# Altium PCB LT4320_1.PcbDoc
Units mil, origin at the board's own origin, x right, y up, seen from the top; angles counter-clockwise.
Board outline 6000 x 4000 mil, 2 copper layers (Top Layer, Bottom Layer); 16 components, 9 nets, 45 pads, 86 vias.
Unrouted connection lines stored in the file: 10.
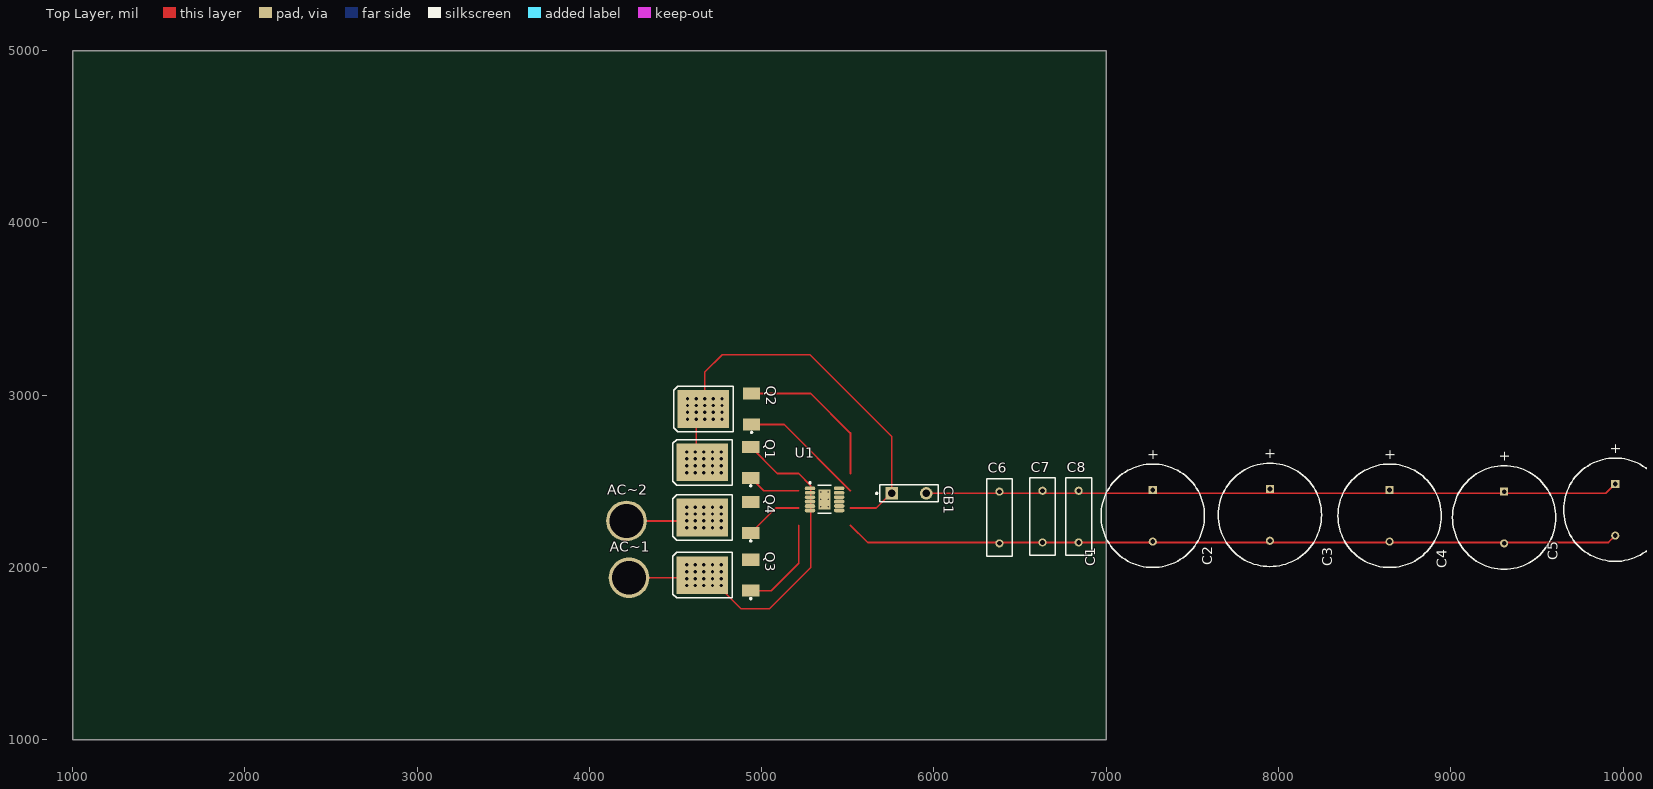
[diagram p0: Top Layer view]
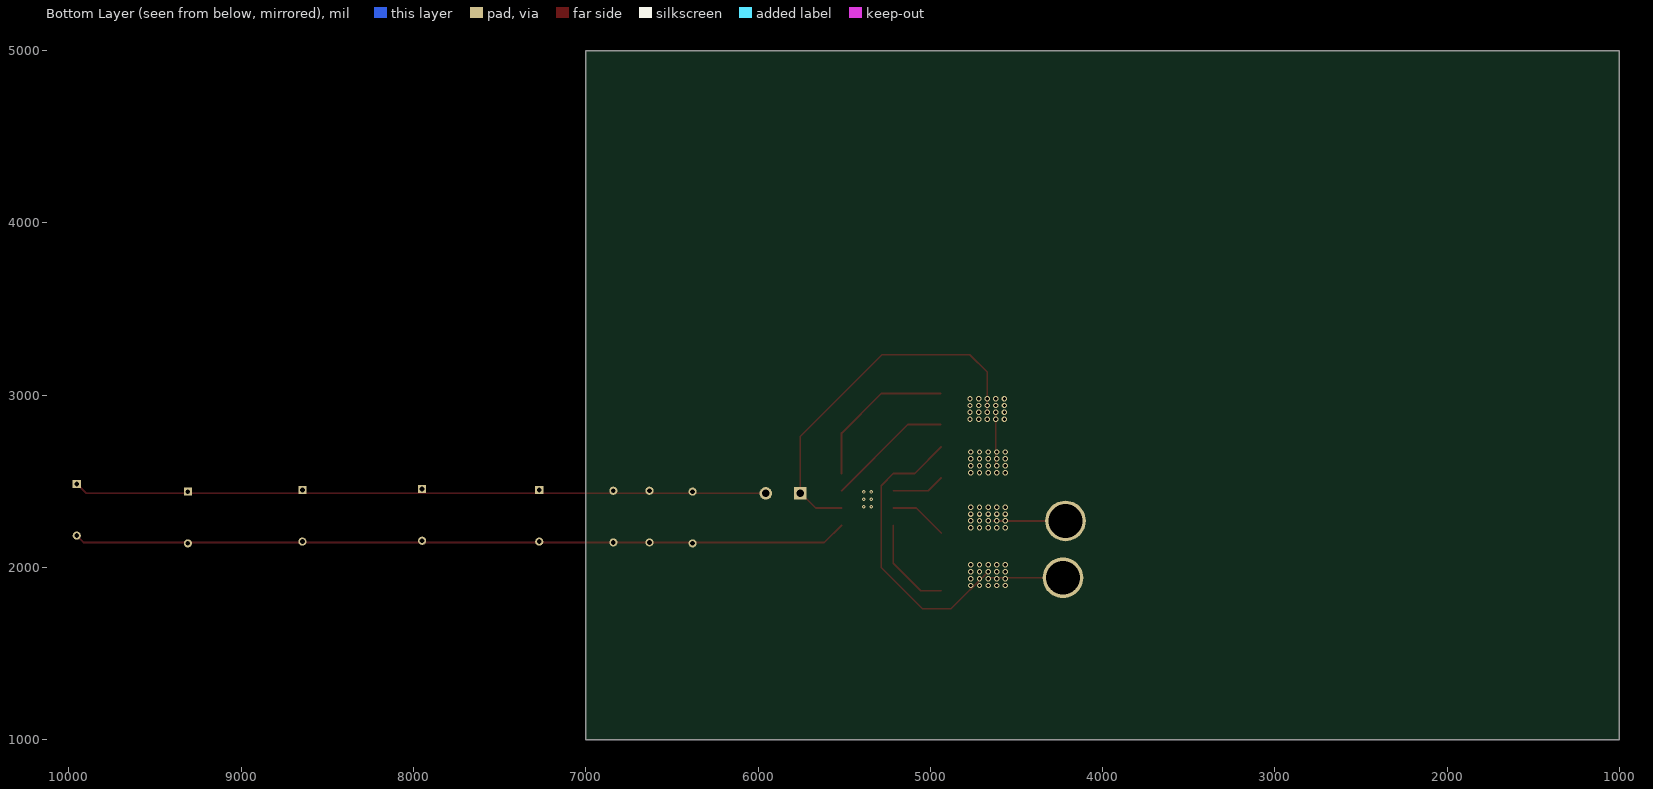
[diagram p1: Bottom Layer view, seen from below]

## Layer stack, top to bottom
Top Layer: signal copper 1.4
Dielectric: dielectric 12.6, FR-4, Dk 4.8
Bottom Layer: signal copper 1.4

## Board outline
1000,1000 7000,1000 7000,5000 1000,5000

## Design rules (kind name [scope] priority, off if disabled: settings)
Clearance [All] p1: gap=10
PolygonConnect [All] p1: connectstyle=Relief reliefconductorwidth=10 reliefentries=4 polygonreliefangle="90 Angle" airgapwidth=10
RoutingVias [All] p1: holewidth=28 width=50 viastyle="Through Hole" minholewidth=28 minwidth=50 maxholewidth=28 maxwidth=50
SolderMaskExpansion [All] p1: expansion=4
Width [All] p1: maxlimit=10 minlimit=10 preferedwidth=10
28 further rules are at their usual default settings.

## Classes and differential pairs
component class LT4320_1: AC~1 AC~2 CB1 Q2 Q3 Q4 U1

## Components (designator, comment, footprint, x,y, rotation, side; value= is the part's Value field where it differs from the comment)
AC~1 "PIN" PIN 4230,1940 r0 top
AC~2 "PIN" PIN 4215,2270 r0 top
C1 "Cap Pol1" RB7.6-15 7270,2300 r90 top
C2 "Cap Pol1" RB7.6-15 7950,2305 r90 top
C3 "Cap Pol1" RB7.6-15 8645,2300 r90 top
C4 "Cap Pol1" RB7.6-15 9310,2290 r90 top
C5 "Cap Pol1" RB7.6-15 9955,2335 r90 top
C6 "Cap" RAD-0.3 6380,2290 r90 top
C7 "Cap" RAD-0.3 6630,2295 r90 top
C8 "Cap" RAD-0.3 6840,2295 r90 top
CB1 "Circuit Breaker" SPST-2 5855,2430 r0 top
Q1 "MOSFET-N" nmos 4740,2605 r0 top
Q2 "MOSFET-N" nmos 4745,2915 r0 top
Q3 "MOSFET-N" nmos 4740,1950 r0 top
Q4 "MOSFET-N" nmos 4740,2285 r0 top
U1 "LT4320-DIP" DIP-8 5365,2395 r0 top

## Footprints (in the part's own frame and the unit in brackets; to place one, negate y for a bottom-side part, rotate by r counter-clockwise, add the part's x,y. Pads: shape width x height; smd on the part's side, far side on the other; paste and mask are expansions set on the pad)
DIP-8 [mm] "DIP; 8 Leads; Row Spacing 7.62 mm; Pitch 2.54 mm"
  oval 1.55x0.55 smd: 1(-2.15,1.625) 2(-2.15,0.975) 3(-2.15,0.325) 4(-2.15,-0.325) 5(-2.15,-0.975) 6(-2.15,-1.625) 7(2.15,-1.625) 8(2.15,-0.975) 9(2.15,-0.325) 10(2.15,0.325) 11(2.15,0.975) 12(2.15,1.625)
  rect 1.75x2.95 smd: 13(0,0)
  silkscreen extent -2.27,-2.05 0.97,2.57, body extent -1.55,-2.05 1.55,2.05, height 1.1
nmos [mil]
  rect 100x70 smd: 1(196.22,-84.76) 3(196.22,94.76)
  rect 299.21x218.5 smd: 2(-85.51,5)
  silkscreen extent -256,-136 201,137
PIN [mm]
  round 6 hole 5: 1(0,0)
RAD-0.3 [mm] "Radial Cap, Thru-Hole; 2 Leads; 0.3 in Pin Spacing"
  round 1.2 hole 0.7: 1(-3.81,0) 2(3.81,0)
  silkscreen extent -5.71,-1.91 5.71,1.91
RB7.6-15 [mm] "Polarized Capacitor (Radial); 2 Leads"
  rect 1.2x1.2 hole 0.7: 1(3.81,0)
  round 1.2 hole 0.7: 2(-3.81,0)
  silkscreen extent -7.62,-7.62 7.62,7.62
SPST-2 [mm] "Switch; 2 Leads"
  rect 1.85x1.85 hole 1.1: 1(-2.54,0)
  round 1.85 hole 1.1: 2(2.54,0)
  silkscreen extent -4.89,-1.27 4.28,1.27

## Part data
C1 C2 C3 C4 C5: "Polarized Capacitor (Radial)"
C6 C7 C8: "Capacitor"
Q1 Q2 Q3 Q4: "N-Channel MOSFET"

## Via types
v1: diameter 31.5, hole 19.68, Top Layer to Bottom Layer, 80 vias
v2: diameter 19.68, hole 7.87, Top Layer to Bottom Layer, 6 vias

## Nets (pads, with @x,y where several pads share a name; then routed paths per layer and width w, separated by ;. In a path a pad name is that pad's centre, name@x,y a point inside that pad or via, vN(x,y) a via of type N, cw(c..) or ccw(c..) an arc to the next point about the centre after c; other vN are vias at no path point)
12V: C1.1 C2.1 C3.1 C4.1 C5.1 C6.2 C7.2 C8.2 CB1.2 | length 4022.8
  Top Layer w10: CB1.2 9900,2430 C5.1
GND: C1.2 C2.2 C3.2 C4.2 C5.2 C6.1 C7.1 C8.1 Q3.3 Q4.3 U1.5 | length 4498
  Top Layer w10: 5515,2245 5615,2145 C7.1 C8.1 9915,2145 C5.2
NetAC~1_1: AC~1.1 Q1.3 Q3.2 U1.1 | length 2155.3
  Top Layer w10: AC~1.1 Q3.2@4659.49,1940 ; v1(4664.49,1975) 4879.49,1760 5045,1760 5285,2000 5285,2475 5215,2545 5090.98,2545 Q1.3
  other v1: 4564.49,1895 4614.49,1895 4664.49,1895 4714.49,1895 4764.49,1895 4564.49,1935 4614.49,1935 4664.49,1935 4714.49,1935 4764.49,1935 4564.49,1975 4614.49,1975 4714.49,1975 4764.49,1975 4564.49,2015 4614.49,2015 4664.49,2015 4714.49,2015 4764.49,2015
NetAC~2_1: AC~2.1 Q2.3 Q4.2 U1.8 | length 1323.4
  Top Layer w10: AC~2.1 v1(4564.49,2270) v1(4614.49,2270) Q4.2@4634.49,2270 ; Q2.3 5285.24,3009.76 5515,2780 5515,2545
  other v1: 4564.49,2230 4614.49,2230 4664.49,2230 4714.49,2230 4764.49,2230 4664.49,2270 4714.49,2270 4764.49,2270 4564.49,2310 4614.49,2310 4664.49,2310 4714.49,2310 4764.49,2310 4564.49,2350 4614.49,2350 4664.49,2350 4714.49,2350 4764.49,2350
NetQ1_1: Q1.1 U1.2 | length 309.9
  Top Layer w10: Q1.1 5011.46,2445 5215,2445
NetQ2_1: Q2.1 U1.7 | length 733.3
  Top Layer w10: Q2.1 5129.76,2830.24 5515,2445
NetQ3_1: Q3.1 U1.4 | length 565
  Top Layer w10: Q3.1 5055.24,1865.24 5215,2025 5215,2245
NetQ4_1: Q4.1 U1.3 | length 338.7
  Top Layer w10: Q4.1 5080.98,2345 5215,2345
VCC: CB1.1 Q1.2 Q2.2 U1.6 | length 2470.7
  Top Layer w10: Q1.2@4619.49,2595 v1(4619.49,2860) v1(4619.49,2900) ; v1(4669.49,2900) v1(4669.49,2940) v1(4669.49,2980) 4669.49,3134.49 4770,3235 5280,3235 5755,2760 CB1.1@5755,2435 ; 5515,2345 5665,2345 CB1.1@5755,2435 ; CB1.1 CB1.1@5755,2435
  other v1: 4564.49,2550 4614.49,2550 4664.49,2550 4714.49,2550 4764.49,2550 4564.49,2590 4614.49,2590 4664.49,2590 4714.49,2590 4764.49,2590 4564.49,2630 4614.49,2630 4664.49,2630 4714.49,2630 4764.49,2630 4564.49,2670 4614.49,2670 4664.49,2670 4714.49,2670 4764.49,2670 4569.49,2860 4669.49,2860 4719.49,2860 4769.49,2860 4569.49,2900 4719.49,2900 4769.49,2900 4569.49,2940 4619.49,2940 4719.49,2940 4769.49,2940 4569.49,2980 4619.49,2980 4719.49,2980 4769.49,2980
pads on no net: U1.9 U1.10 U1.11 U1.12 U1.13
copper on no net:
  other v2: 5343.35,2351.69 5386.65,2351.69 5343.35,2395 5386.65,2395 5343.35,2438.31 5386.65,2438.31

## Text inside footprints (layer, text, board x,y; h text height)
C1: Top Overlay "+" at 7299.01,2620.15 h59.06 r90
C2: Top Overlay "+" at 7979.01,2625.15 h59.06 r90
C3: Top Overlay "+" at 8674.01,2620.15 h59.06 r90
C4: Top Overlay "+" at 9339.01,2610.15 h59.06 r90
C5: Top Overlay "+" at 9984.01,2655.15 h59.06 r90